# Altium PCB testBoard.PcbDoc
Units mil, origin at the board's own origin, x right, y up, seen from the top; angles counter-clockwise.
Board outline 1170 x 880 mil, 2 copper layers (Top Layer, Bottom Layer); 12 components, 10 nets, 37 pads, 4 vias.
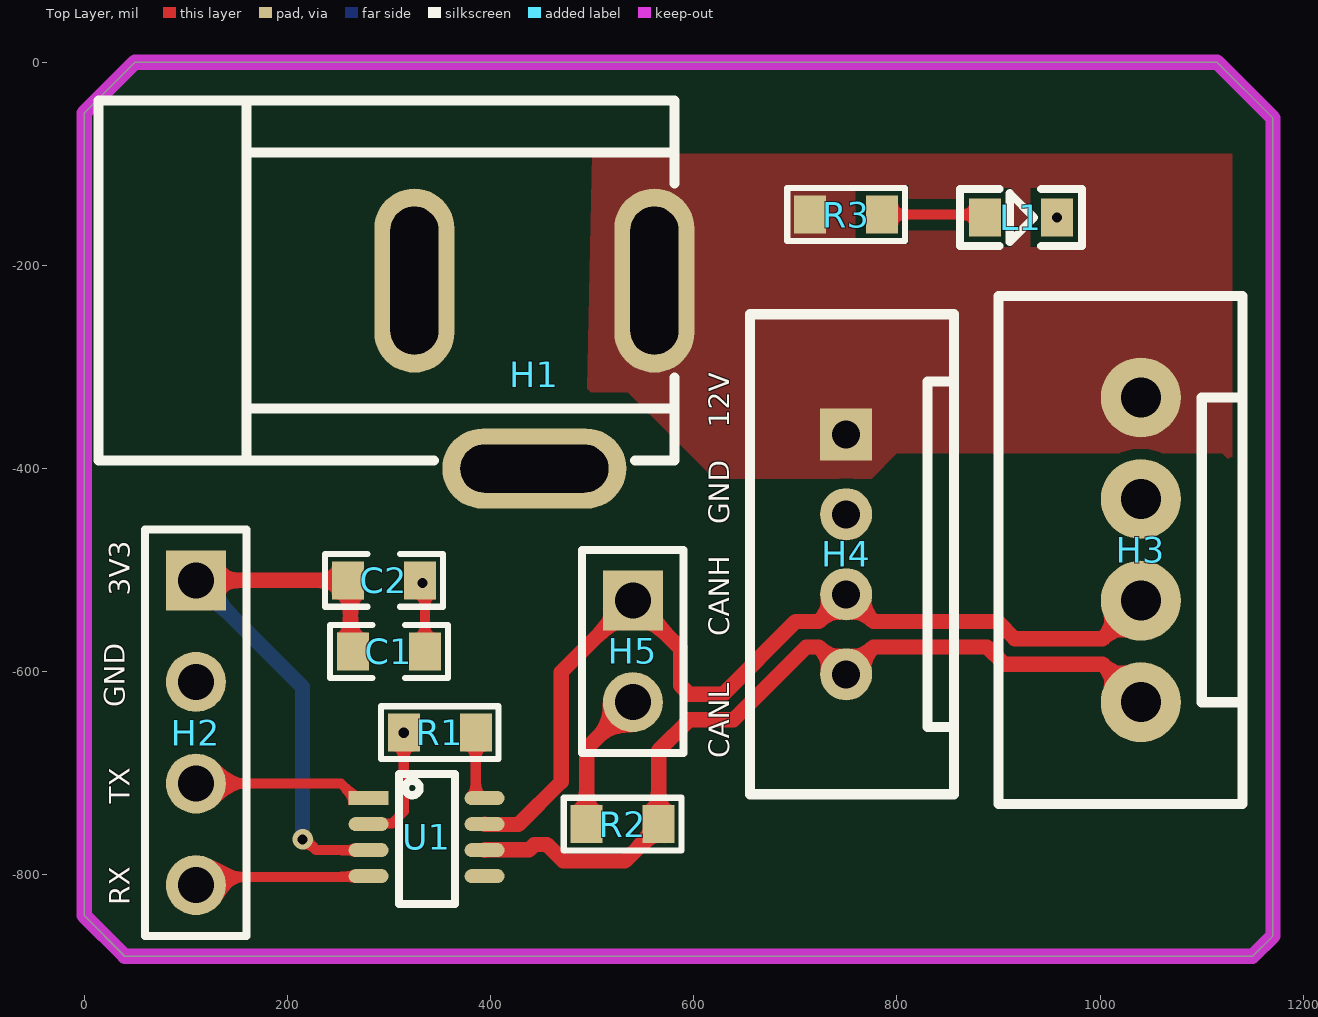
[diagram p0: Top Layer view]
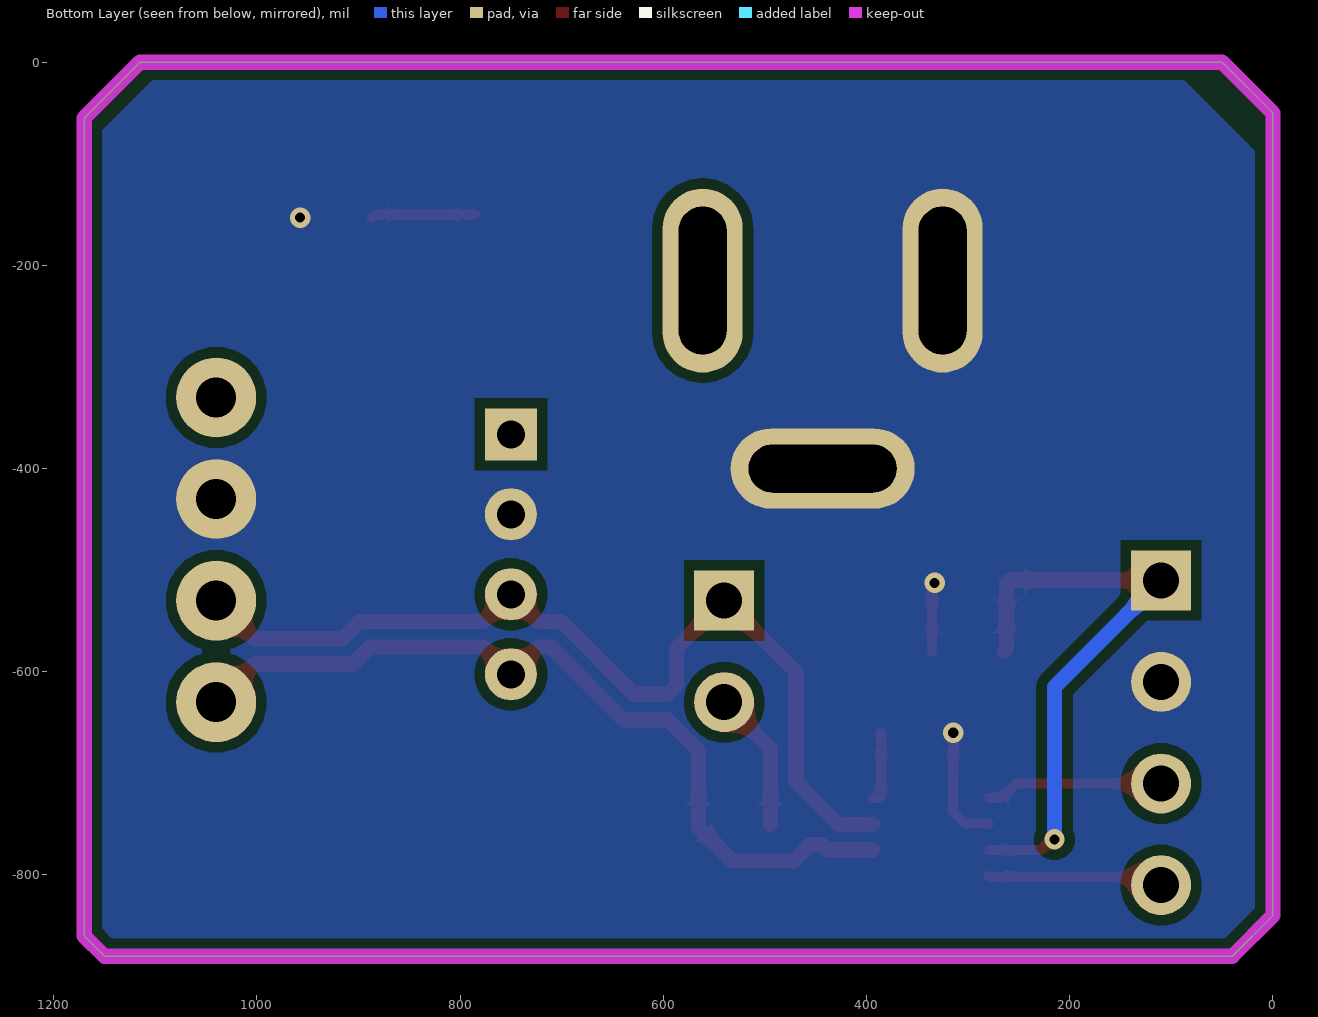
[diagram p1: Bottom Layer view, seen from below]
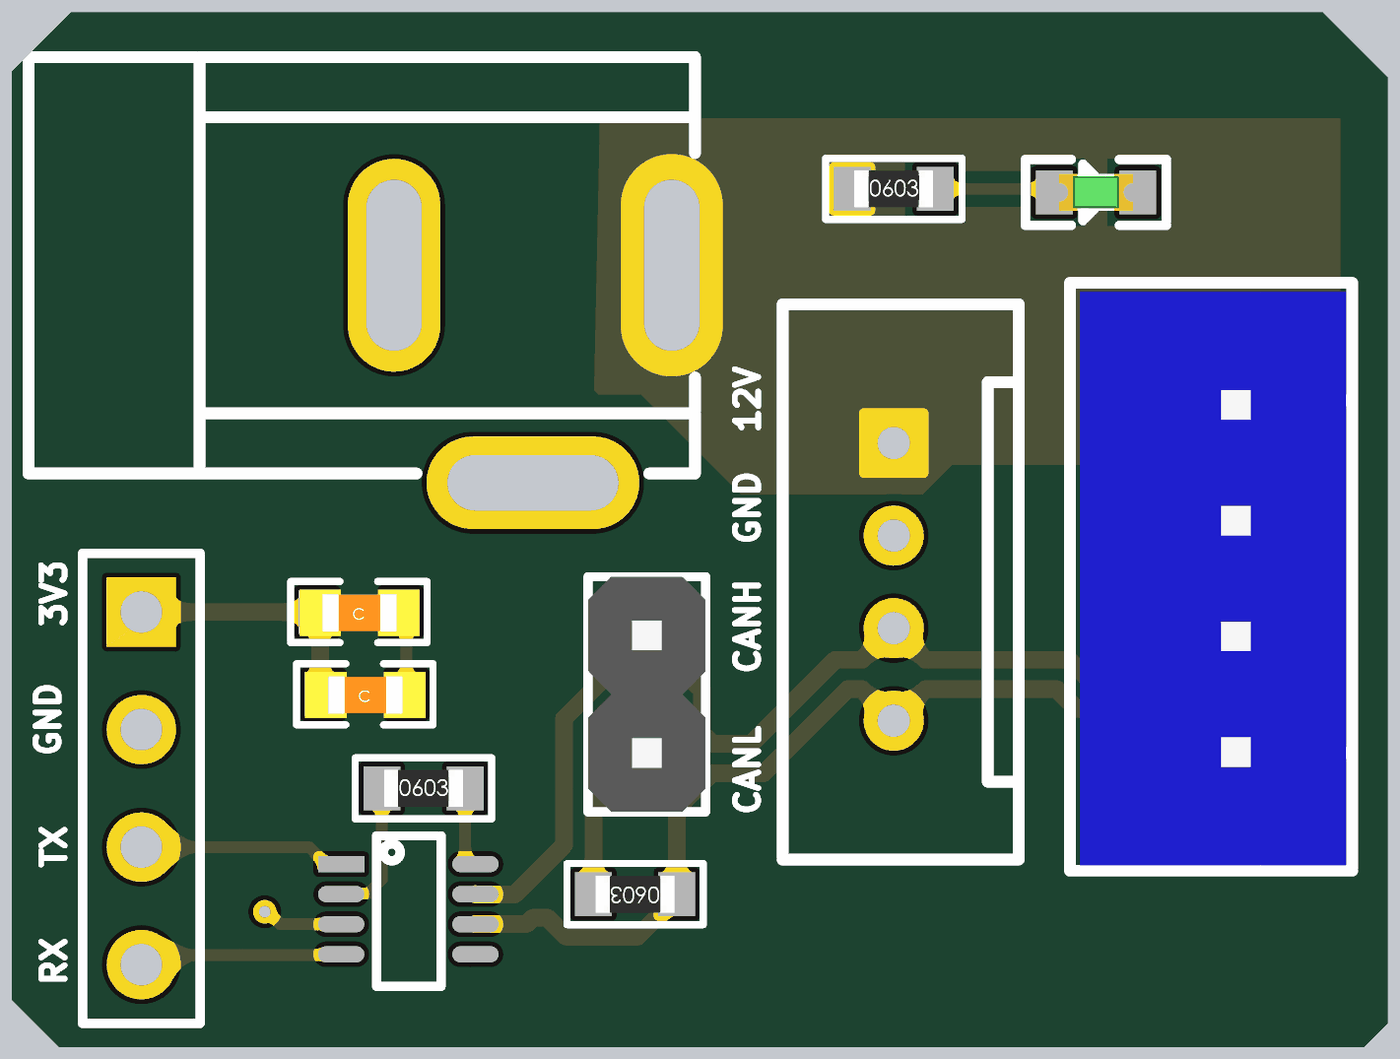
[diagram p2: 3D render of the assembled board from above, using the file's embedded part models]

## Layer stack, top to bottom
Top Solder: solder mask 0.4, Solder Resist, Dk 3.5
Top Layer: signal copper 1.4
Dielectric 1: dielectric 12.6, FR-4, Dk 4.8
Bottom Layer: signal copper 1.4
Bottom Solder: solder mask 0.4, Solder Resist, Dk 3.5

## Board outline
0,-840 0,-50 50,0 1115,0 1170,-55 1170,-860 1150,-880 40,-880

## Design rules (kind name [scope] priority, off if disabled: settings)
Clearance [All] p1: gap=10 ignorepadtopadclearanceinfootprint=FALSE except(0: Arc-Hole Track-Hole SMDPad-Hole THPad-Hole Via-Hole Fill-Hole Poly-Hole Region-Hole Text-Hole)
DiffPairsRouting [All] p1: maxlimit=10 minlimit=10 mostfreqgap=10 toplayer_minwidth=15 toplayer_maxwidth=15 toplayer_prefwidth=15 bottomlayer_minwidth=15 bottomlayer_maxwidth=15 bottomlayer_prefwidth=15 maxuncoupledlength=500
PlaneConnect [All] p1: planeconnectstyle=Direct reliefexpansion=20 reliefentries=4 reliefconductorwidth=10 reliefairgap=10
PolygonConnect [All] p1: connectstyle=Direct reliefconductorwidth=10 reliefentries=4 polygonreliefangle="90 Angle" airgapwidth=10
RoutingVias [All] p1: holewidth=28 width=50 viastyle="Through Hole" minholewidth=28 minwidth=50 maxholewidth=28 maxwidth=50
SolderMaskExpansion [All] p1: expansion=4 istentingtop=FALSE
Width [All] p1: maxlimit=100 minlimit=10 preferedwidth=10 minimp=50.000000 maximp=50.000000 favimp=50.000000
28 further rules are at their usual default settings.

## Classes and differential pairs
differential pair CAN: +CAN_P -CAN_N

## Components (designator, comment, footprint, x,y, rotation, side; value= is the part's Value field where it differs from the comment)
C1 "106" C_0603 300,-580 r0 top
C2 "104" C_0603 295,-510 r0 top
H1 "DC电源接口" DC005-插件 15,-40 r270 top
H2 "H_Header_1X4" H_Header_1X4 100.16,-775.75 r90 top
H3 "XH2.54_4" H_XH2.54_4 1040,-480 r270 top
H4 "HY2.0" "HY2.0_4P_插直 - duplicate" 750,-366.26 r270 top
H5 "H_Header_1X2H" H_Header_1X2 540,-530 r270 top
L1 "Y_LED_G" Y_LED_0603_G 860,-125 r0 top
R1 "24K" R_0603 350,-660 r0 top
R2 "120R" R_0603 530,-750 r180 top
R3 "10K" R_0603 750,-150 r0 top
U1 "MAX3051EKA" SOT23-8 280,-724.41 r0 top

## Footprints (in the part's own frame and the unit in brackets; to place one, negate y for a bottom-side part, rotate by r counter-clockwise, add the part's x,y. Pads: shape width x height; smd on the part's side, far side on the other; paste and mask are expansions set on the pad)
C_0603 [mm] "贴片无极性电容0603封装"
  rect 0.8x0.95 smd: 1(-0.9,0) 2(0.9,0)
  silkscreen extent -1.47,-0.66 1.47,0.66, body extent -1.29,-0.52 1.31,0.48, height 0.89
DC005-插件 [mm]
  oval 4.6x2 hole 1.2 slot 3.7 at 0 deg: 1(4.445,7.874) 2(4.445,13.873)
  oval 2x4.6 hole 1.2 slot 3.7 at 90 deg: 1(9.145,10.874)
  silkscreen extent -0.06,-0.03 8.94,14.37
H_Header_1X2 [mm] "单排2针排针"
  rect 1.5x1.5 hole 0.9: 1(0,0)
  round 1.5 hole 0.9: 2(2.54,0)
  silkscreen extent -1.27,-1.27 3.81,1.27, body extent -1.27,-1.27 3.81,1.27, height 8.54
H_Header_1X4 [mm] "单排4针排针"
  rect 1.5x1.5 hole 0.9: 1(6.75,-0.25)
  round 1.5 hole 0.9: 2(4.21,-0.25) 3(1.67,-0.25) 4(-0.87,-0.25)
  silkscreen extent -2.14,-1.52 8.02,1.02
H_XH2.54_4 [mm]
  round 2 hole 1: 1(-3.81,0) 2(-1.27,0) 3(1.27,0) 4(3.81,0)
  silkscreen extent -6.35,-3.56 6.35,2.54, body extent -6.16,-3.35 6.24,2.4, height 7
"HY2.0_4P_插直 - duplicate" [mm]
  rect 1.3x1.3 hole 0.7: 1(0,0)
  round 1.3 hole 0.7: 2(2,0) 3(4,0) 4(6,0)
  silkscreen extent -3,-2.4 9,2.7
R_0603 [mm] "贴片电阻0603封装"
  rect 0.8x0.95 smd: 1(-0.9,0) 2(0.9,0)
  silkscreen extent -1.47,-0.66 1.47,0.66, body extent -0.85,-0.4 0.85,0.4, height 0.53
SOT23-8 [mm]
  rect 1x0.35 smd: 1(0,0)
  oval 1x0.35 smd: 2(0,-0.65) 3(0,-1.3) 4(0,-1.95) 5(2.9,-1.95) 6(2.9,-1.3) 7(2.9,-0.65) 8(2.9,0)
  silkscreen extent 0.76,-2.64 2.16,0.61
Y_LED_0603_G [mm] "绿色贴片0603LED"
  rect 0.8x0.95 smd: 1(0.675,-0.711) 2(2.475,-0.711)
  silkscreen extent 0.05,-1.42 3.1,0, body extent 0.77,-1.11 2.37,-0.31, height 0.6

## Part data
C1 C2: library part C_无极贴片, "无极性贴片电容"
H2: "单排4针排针", LatestRevisionDate=17-Jul-2002, LatestRevisionNote="Re-released for DXP Platform.", Publisher="Altium Limited"
H3: library part H_XH2.54_4, "4脚小白头", LatestRevisionDate=17-Jul-2002, LatestRevisionNote="Re-released for DXP Platform.", Publisher="Altium Limited"
H4: library part HY2.0_4P
H5: "单排2针排母", LatestRevisionDate=17-Jul-2002, LatestRevisionNote="Re-released for DXP Platform.", Publisher="Altium Limited"
L1: "绿色LED"
R1 R2 R3: library part R_贴片, "贴片电阻"
U1: "CAN-1Mbps"

## Via types
v1: diameter 20, hole 10, Top Layer to Bottom Layer, 4 vias

## Nets (pads, with @x,y where several pads share a name; then routed paths per layer and width w, separated by ;. In a path a pad name is that pad's centre, name@x,y a point inside that pad or via, vN(x,y) a via of type N, cw(c..) or ccw(c..) an arc to the next point about the centre after c; other vN are vias at no path point)
3V3: C1.1 C2.1 H2.1 U1.3 | length 589.5
  Top Layer w10: v1(215,-765) 217.71,-765 228.3,-775.59 U1.3
  Top Layer w15: H2.1 C2.1 262.07,-512.5 262.07,-577.5 C1.1
  Bottom Layer w15: H2.1 215,-615 v1(215,-765)
12V: H1.2 H3.1 H4.1 R3.1
CAN_N: H3.4 H4.4 R2.1 U1.6 | length 830.9
  Top Layer w15: U1.6 394.47,-775.3 437.89,-775.3 443.06,-770.12 455.49,-770.12 471.57,-786.2 532.19,-786.2 565.43,-752.95 R2.1 565.43,-677.61 595.81,-647.23 639.07,-647.23 710.7,-575.61 723.12,-575.61 H4.4 776.88,-575.61 888.7,-575.61 905.59,-592.5 1002.43,-592.5 1039.93,-630 H3.4
CAN_P: H3.3 H4.3 H5.1 U1.7 | length 934.4
  Top Layer w15: U1.7 394.47,-750.3 427.53,-750.3 469.57,-708.26 469.57,-600.43 H5.1 587.03,-577.03 587.03,-613.45 595.81,-622.23 628.72,-622.23 700.34,-550.61 723.12,-550.61 H4.3 776.88,-550.61 899.06,-550.61 915.94,-567.5 1002.43,-567.5 1039.93,-530 H3.3
CANRX: H2.4 U1.4 | length 173.7
  Top Layer w10: H2.4 118.1,-801.9 279.28,-801.9 U1.4
CANTX: H2.3 U1.1 | length 176
  Top Layer w10: H2.3 252.8,-710 267.2,-724.41 U1.1
GND: C1.2 C2.2 H1.1 H2.2 H3.2 H4.2 L1.2 R1.1 U1.2 | length 189.5
  Top Layer w10: U1.2 280.72,-749.28 302.92,-749.28 314.69,-737.51 314.69,-705.67 314.57,-705.55 v1(314.57,-660) ; C2.2 335.43,-515 C1.2
  other v1: 332.93,-512.5 957.43,-153
NetH5_2: H5.2 R2.2 | length 138.8
  Top Layer w15: R2.2 494.57,-675.43 H5.2
NetL1_1: L1.1 R3.2 | length 102.4
  Top Layer w10: R3.2 883.57,-150 L1.1
NetR1_2: R1.2 U1.8 | length 72.1
  Top Layer w10: R1.2 385.43,-722.66 387.18,-724.41 U1.8
pads on no net: U1.5

## Polygon pours and split planes (outlines as drawn)
12V on Top Layer "12V_L01_P000" (solid, pour order 0): 500,-90 1130,-90 1130,-395 1120,-385 800,-385 775,-410 620,-410 535,-325 495,-325
GND on Bottom Layer "GND_L02_P001" (solid, pour order 1): 0,-105 105,0 1085,0 1170,-85 1170,-855 1150,-875 1150,-880 40,-880 0,-840

## Keep-outs
Keep-Out Layer:
  lines w15: 0,-840 0,-590 0,-50 50,0 1115,0 1170,-55 1170,-860 1150,-880 40,-880 0,-840

## Silkscreen, mask and mechanical layers (free items; w line width, h text height)
Top Overlay:
  text "12V" at 635,-360 h20 r90
  text "GND" at 635,-455 h20 r90
  text "3V3" at 45,-525 h20 r90
  text "CANH" at 635,-565 h20 r90
  text "GND" at 40,-635 h20 r90
  text "CANL" at 635,-685 h20 r90
  text "TX" at 45,-730 h20 r90
  text "RX" at 45,-830 h20 r90